# Altium PCB OErs_Drone.PcbDoc
Units mil, origin at the board's own origin, x right, y up, seen from the top; angles counter-clockwise.
Board outline 6299.74 x 4274.94 mil, 2 copper layers (Top Layer, Bottom Layer), stack 61.756 mil thick; 90 components, 68 nets, 329 pads, 0 vias.
Unrouted connection lines stored in the file: 222.
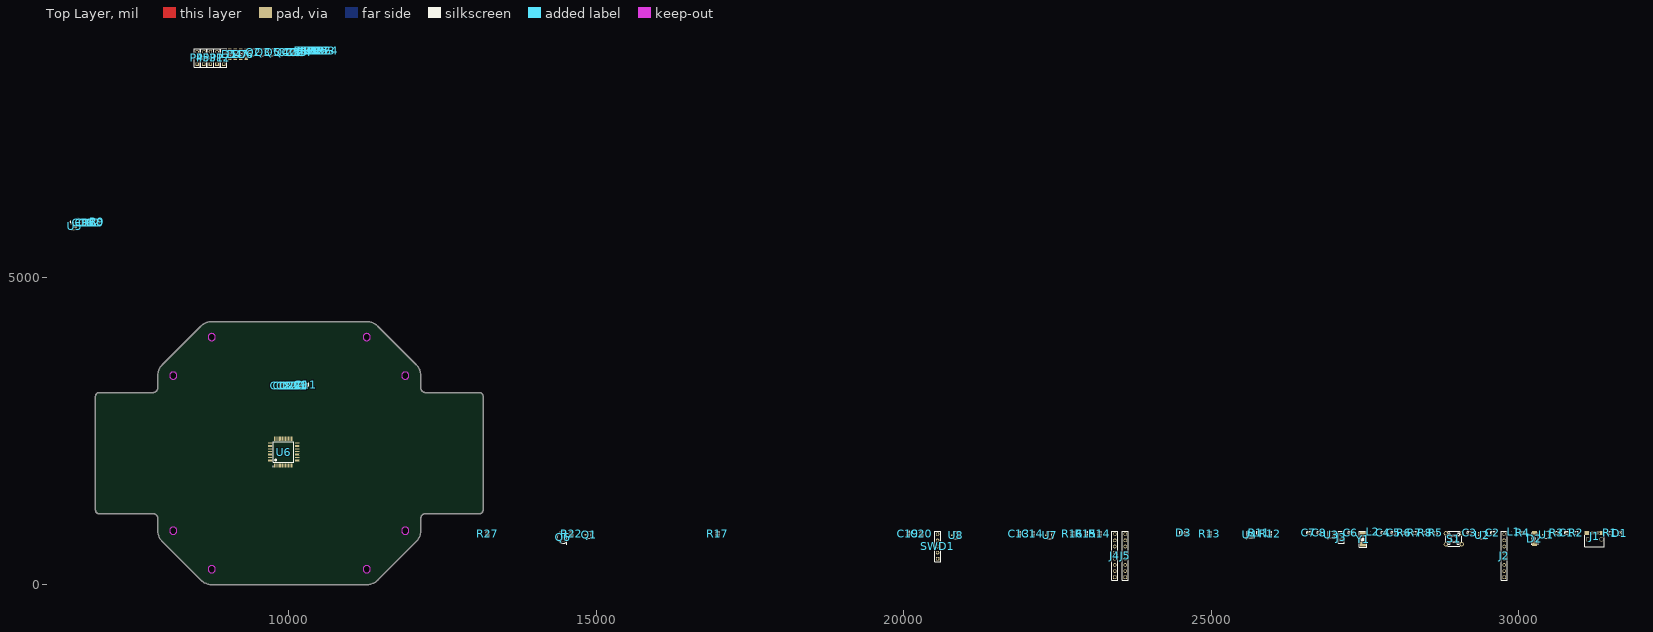
[diagram p0: Top Layer view]
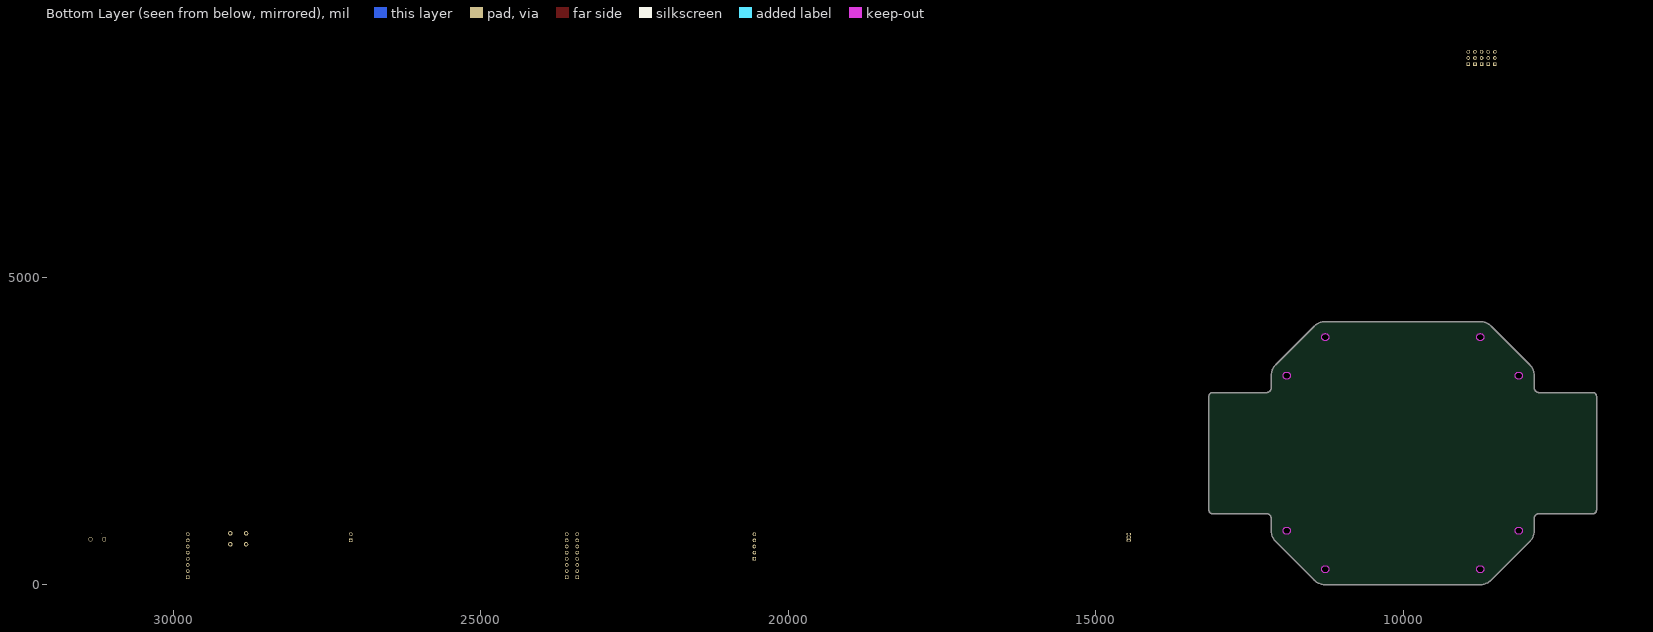
[diagram p1: Bottom Layer view, seen from below]

## Layer stack, top to bottom
Top Solder: solder mask 1, SM-001, Dk 4
Top Layer: signal copper 1.378
Dielectric 1: core 59, Core-043, Dk 4.3
Bottom Layer: signal copper 1.378
Bottom Solder: solder mask 1, SM-001, Dk 4

## Board outline
6920.92,1152.94 7795.53,1152.94 cw(c7795.53,1074.46) 7874,1074.46 7874,877.61 ccw(c8125.45,877.61) 7948.81,698.66 ccw(c8125.45,877.61) 7948.82,698.65 8572.69,74.78 8572.69,74.77 ccw(c8751.63,251.43) 8751.63,-0.01 11271.31,-0.01 ccw(c11271.31,251.43) 11447.67,72.21 ccw(c11271.31,251.43) 11447.68,72.21 ccw(c11271.31,251.43) 11450.89,75.43 12059.81,685.58 ccw(c11897.49,877.61) 12089.86,715.68 ccw(c11897.49,877.61) 12148.94,877.61 12148.94,1074.46 cw(c12227.42,1074.46) 12227.42,1152.94 13102.02,1152.94 ccw(c13102.02,1212.26) 13161.34,1212.26 13161.34,3062.65 ccw(c13102.02,3062.65) 13102.02,3121.97 12227.42,3121.97 cw(c12227.42,3200.45) 12148.94,3200.45 12148.94,3397.3 ccw(c11897.49,3397.3) 12074.83,3575.55 12074.83,3575.56 11449.77,4200.62 11449.76,4200.63 cw(c11271.31,4023.48) 11449.77,4200.62 11449.76,4200.63 ccw(c11271.31,4023.48) 11271.31,4274.92 8751.63,4274.92 ccw(c8751.63,4023.48) 8574.59,4202.03 ccw(c8574.77,4201.85) 8574.59,4202.03 8574.58,4202.03 cw(c8751.63,4023.48) 8574.59,4202.03 8574.58,4202.03 ccw(c8751.63,4023.48) 8573.08,4200.52 ccw(c8751.63,4023.48) 8573.07,4200.52 8573.08,4200.52 7948.07,3575.51 ccw(c8125.45,3397.3) 7874,3397.3 7874,3200.45 cw(c7795.53,3200.45) 7795.53,3121.97 6920.92,3121.97 ccw(c6920.92,3062.65) 6861.6,3062.65 6861.6,1212.26 ccw(c6920.92,1212.26)
cut-out: 8066.39,877.61 ccw(c8125.45,877.61) 8125.45,818.56 ccw(c8125.45,877.61) 8184.5,877.61 ccw(c8125.45,877.61) 8125.45,936.67 ccw(c8125.45,877.61)
cut-out: 8692.57,251.43 ccw(c8751.63,251.43) 8751.63,192.38 ccw(c8751.63,251.43) 8810.68,251.43 ccw(c8751.63,251.43) 8751.63,310.49 ccw(c8751.63,251.43)
cut-out: 11212.26,251.43 ccw(c11271.31,251.43) 11271.31,192.38 ccw(c11271.31,251.43) 11330.37,251.43 ccw(c11271.31,251.43) 11271.31,310.49 ccw(c11271.31,251.43)
cut-out: 11838.44,877.61 ccw(c11897.49,877.61) 11897.49,818.56 ccw(c11897.49,877.61) 11956.55,877.61 ccw(c11897.49,877.61) 11897.49,936.67 ccw(c11897.49,877.61)
cut-out: 11838.44,3397.3 ccw(c11897.49,3397.3) 11897.49,3338.24 ccw(c11897.49,3397.3) 11956.55,3397.3 ccw(c11897.49,3397.3) 11897.49,3456.35 ccw(c11897.49,3397.3)
cut-out: 11212.26,4023.48 ccw(c11271.31,4023.48) 11271.31,3964.42 ccw(c11271.31,4023.48) 11330.37,4023.48 ccw(c11271.31,4023.48) 11271.31,4082.53 ccw(c11271.31,4023.48)
cut-out: 8692.57,4023.48 ccw(c8751.63,4023.48) 8751.63,3964.42 ccw(c8751.63,4023.48) 8810.68,4023.48 ccw(c8751.63,4023.48) 8751.63,4082.53 ccw(c8751.63,4023.48)
cut-out: 8066.39,3397.3 ccw(c8125.45,3397.3) 8125.45,3338.24 ccw(c8125.45,3397.3) 8184.5,3397.3 ccw(c8125.45,3397.3) 8125.45,3456.35 ccw(c8125.45,3397.3)

## Design rules (kind name [scope] priority, off if disabled: settings)
Clearance [All] p1: gap=6 ignorepadtopadclearanceinfootprint=FALSE except(0: Arc-Hole Track-Hole SMDPad-Hole THPad-Hole Via-Hole Fill-Hole Poly-Hole Region-Hole Text-Hole)
ComponentClearance [All] p1: gap=0 collisioncheckmode=3 verticalgap=0 showdistances=FALSE
HoleToHoleClearance [All] p1: gap=4 allowstackedmicrovias=TRUE
MinimumSolderMaskSliver [All] p1: minsoldermaskwidth=4
NetAntennae [All] p1: netantennaetolerance=2
PolygonConnect [All] p1: thpad.connectstyle=Relief thpad.reliefconductorwidth=10 thpad.reliefentries=4 thpad.polygonreliefangle="90 Angle" thpad.airgapwidth=10 smdpad.connectstyle=Direct smdpad.reliefconductorwidth=10 smdpad.reliefentries=4 smdpad.polygonreliefangle="90 Angle" smdpad.airgapwidth=10 via.connectstyle=Direct via.reliefconductorwidth=10 via.reliefentries=4 via.polygonreliefangle="90 Angle" via.airgapwidth=10
RoutingVias [All] p1: holewidth=12 width=24 viastyle="Through Hole" minholewidth=12 minwidth=24 maxholewidth=15 maxwidth=25
SilkToSilkClearance [All] p1: silktosilkclearance=1
SilkToSolderMaskClearance [IsPad] p1: minsilkscreentomaskgap=1 clearancetoexposedcopper=TRUE
SolderMaskExpansion [All] p1: expansion=4 istentingtop=FALSE
UnRoutedNet [All] p1: checkbadconnections=TRUE
Width [All] p1: maxlimit=50 minlimit=6 preferedwidth=6
23 further rules are at their usual default settings.

## Components (designator, comment, footprint, x,y, rotation, side; value= is the part's Value field where it differs from the comment)
C1 "C_0402" C0402 30780,845 r0 top value=0.1uF
C2 "C_0402" C0402 29575,845 r0 top value=22uF
C3 "C_0402" C0402 29200,845 r0 top value=15pF
C4 "C_0402" C0402 27795,845 r0 top value=20pF
C5 "C_0402" C0402 27965,845 r0 top value=22uF
C6 "C_0402" C0402 27265,845 r0 top value=20pF
C7 "C_0402" C0402 26585,845 r0 top value=0.1uF
C8 "C_0402" C0402 26755,845 r0 top value=0.1uF
C9 "C_0402" C0402 10209.97,3248.43 r0 top value=0.1uF
C10 "C_0402" C0402 9983.58,3234.65 r90 top value=0.1uF
C11 "C_0402" C0402 10290.68,3248.43 r0 top value=0.1uF
C12 "C_0402" C0402 6768.41,5884.65 r90 top value=0.1uF
C13 "C_0402" C0402 21880,830 r90 top value=0.1uF
C14 "C_0402" C0402 22100,830 r90 top value=0.1uF
C15 "C_0402" C0402 6715.26,5884.65 r90 top value=0.1uF
C16 "C_0402" C0402 6662.11,5884.65 r90 top value=10nF
C17 "C_0402" C0402 9930.42,3234.65 r90 top value=0.1uF
C18 "C_0402" C0402 9877.27,3234.65 r90 top value=0.1uF
C19 "C_0402" C0402 20075,830 r90 top value=0.1uF
C20 "C_0402" C0402 20295,830 r90 top value=0.1uF
C21 "C_0402" C0402 10143.03,3234.65 r90 top value=0.1uF
C22 "C_0603" C0603 10076.31,8655 r90 top value=10uF
C23 "C_0603" C0603 10010.19,8655 r90 top value=10uF
C24 "C_0603" C0603 10208.55,8655 r90 top value=10uF
C25 "C_0603" C0603 10142.43,8655 r90 top value=10uF
C26 "C_0402" C0402 10089.88,3234.65 r90 top value=4.7uF
C27 "C_0402" C0402 10036.73,3234.65 r90 top value=0.1uF
D1 "RGB_LED" LED-RGB 31635,835 r0 top
D2 "SS14" SMA_L4.4-W2.8-LS5.4-RD 30255,750 r90 top
D3 "LED_0603" LED0603-FD 24550,840 r0 top
D4 "1N4148" SOD-123_L2.8-W1.8-LS3.7-RD 9132.48,8620.45 r90 top
D5 "1N4148" SOD-123_L2.8-W1.8-LS3.7-RD 9043.74,8620.45 r90 top
D6 "1N4148" SOD-123_L2.8-W1.8-LS3.7-RD 9309.96,8620.45 r90 top
D7 "1N4148" SOD-123_L2.8-W1.8-LS3.7-RD 9221.22,8620.45 r90 top
J1 "MICRO_USB_5S" MICRO-USB-SMD_U254-051T-4BH83-F1S 31230,790 r0 top
J2 "MC7RB" HDR1X8 29760,120 r90 top
J3 "Header 2H" HDR1X2 27110,720 r90 top
J4 "openMV" HDR1X8 23430,120 r90 top
J5 "openMV" HDR1X8 23600,120 r90 top
L1 "" 0603 29915,860 r0 top value=4.7uH
L2 "" 0603 27620,860 r0 top value=300@100MHZ
P1 "HEAD3" HDR1X3 8837.56,8461.06 r90 top
P2 "HEAD3" HDR1X3 8945.43,8461.06 r90 top
P3 "HEAD3" HDR1X3 8729.68,8461.06 r90 top
P4 "HEAD3" HDR1X3 8513.94,8461.06 r90 top
P5 "HEAD3" HDR1X3 8621.81,8461.06 r90 top
Q1 "AO3401" SOT-23-3_L2.9-W1.3-P1.90-LS2.4-BR 14885,810 r0 top
Q2 "SI2302" SOT-23-3_L2.9-W1.3-P1.90-LS2.4-BR 9432.14,8652.52 r0 top
Q3 "SI2302" SOT-23-3_L2.9-W1.3-P1.90-LS2.4-BR 9587.75,8652.52 r0 top
Q4 "SI2302" SOT-23-3_L2.9-W1.3-P1.90-LS2.4-BR 9898.97,8652.52 r0 top
Q5 "SI2302" SOT-23-3_L2.9-W1.3-P1.90-LS2.4-BR 9743.36,8652.52 r0 top
Q6 "SS9013" TO-92A 14465,770 r0 top
R1 "R_0402" R0402 31485,845 r0 top value=470
R2 "R_0402" R0402 30930,845 r0 top value=330
R3 "R_0402" R0402 30610,845 r0 top value=10K
R4 "R_0402" R0402 30065,845 r0 top value=100
R5 "R_0402" R0402 28645,845 r0 top value=73.2K
R6 "R_0402" R0402 28135,845 r0 top value=100K
R7 "R_0402" R0402 28305,845 r0 top value=10K
R8 "R_0402" R0402 28475,845 r0 top value=4.7K
R9 "R_0402" R0402 6888.51,5898.42 r0 top value=4.7K
R10 "R_0402" R0402 6821.57,5884.65 r90 top value=4.7K
R11 "R_0402" R0402 25775,845 r0 top value=10K
R12 "R_0402" R0402 25960,830 r90 top value=4.7K
R13 "R_0402" R0402 24975,830 r90 top value=10K
R14 "R_0402" R0402 23185,830 r90 top value=10K
R15 "R_0402" R0402 22965,830 r90 top value=10K
R16 "R_0402" R0402 22745,830 r90 top value=10K
R17 "R_0402" R0402 16975,830 r90 top value=10K
R18 "R_0402" R0402 10267.84,8674.65 r90 top value=100R
R19 "R_0402" R0402 10427.29,8674.65 r90 top value=100R
R20 "R_0402" R0402 10374.14,8674.65 r90 top value=100R
R21 "R_0402" R0402 10320.99,8674.65 r90 top value=100R
R22 "R_0402" R0402 14605,830 r90 top value=1K
R23 "R_0402" R0402 10586.75,8674.65 r90 top value=10K
R24 "R_0402" R0402 10639.9,8674.65 r90 top value=10K
R25 "R_0402" R0402 10480.45,8674.65 r90 top value=10K
R26 "R_0402" R0402 10533.6,8674.65 r90 top value=10K
R27 "R_0402" R0402 13240,830 r90 top value=10K
S1 "667" KEY-TH_4P-L6.0-W6.0-P4.50-LS6.5 28940,745 r0 top
SWD1 "SWD" HDR1X5 20550,420 r90 top
U1 "BAT54C" SOT-23-3_L2.9-W1.6-P1.90-LS2.8-BR 30445,810 r0 top
U2 "SX1308" SOT-23-6_L2.9-W1.6-P0.95-LS2.8-BR 29405,805 r0 top
U3 "BMP280" SENSOR-TH_BMP280-BL 26950,815 r0 top
U4 "BMP280" SENSOR-TH_BMP280-BL 25625,815 r0 top
U5 "MPU9250" MPU9250 6466.97,5765.43 r0 top
U6 "STM32F411RE" LQFP-64_L10.0-W10.0-P0.50-LS12.0-BL 9920,2155 r0 top
U7 "XC6206" SOT-23-3_L3.0-W1.7-P0.95-LS2.9-BR 22370,805 r0 top
U8 "XC6206" SOT-23-3_L3.0-W1.7-P0.95-LS2.9-BR 20845,805 r0 top
Y1 "8MHZ" OSC-SMD_L5.0-W3.2 27465,735 r90 top

## Footprints (in the part's own frame and the unit in brackets; to place one, negate y for a bottom-side part, rotate by r counter-clockwise, add the part's x,y. Pads: shape width x height; smd on the part's side, far side on the other; paste and mask are expansions set on the pad)
0603 [mm] "Chip Inductor, Body 0.6x0.3mm, IPC High Density"
  rect 0.5x0.3 smd: 1(-0.35,0) 2(0.35,0)
  silkscreen extent -0.9,-0.05 -0.9,0.05, body extent -0.33,-0.18 0.33,0.18, height 0.55
C0402 [mm]
  rect 0.5x0.8 smd: 1(-0.5,0) 2(0.5,0)
  silkscreen extent -0.95,-0.6 0.95,0.6
C0603 [mm]
  rect 0.8x0.9 smd: 1(-0.7,0) 2(0.7,0)
  silkscreen extent -1.4,-0.7 1.4,0.72
HDR1X2 [mm] "Connector; Header; 2 Position"
  rect 1.5x1.5 hole 0.9: 1(0,0)
  round 1.5 hole 0.9: 2(2.54,0)
  silkscreen extent -1.27,-1.27 3.81,1.27
HDR1X3 [mm] "Connector; Header; 3 Position"
  rect 1.5x1.5 hole 0.9: 1(0,0)
  round 1.5 hole 0.9: 2(2.54,0) 3(5.08,0)
  silkscreen extent -1.27,-1.27 6.35,1.27
HDR1X5 [mm] "Connector; Header; 5 Position"
  rect 1.5x1.5 hole 0.9: 1(0,0)
  round 1.5 hole 0.9: 2(2.54,0) 3(5.08,0) 4(7.62,0) 5(10.16,0)
  silkscreen extent -1.27,-1.27 11.43,1.27
HDR1X8 [mm] "Connector; Header; 8 Position"
  rect 1.5x1.5 hole 0.9: 1(0,0)
  round 1.5 hole 0.9: 2(2.54,0) 3(5.08,0) 4(7.62,0) 5(10.16,0) 6(12.7,0) 7(15.24,0) 8(17.78,0)
  silkscreen extent -1.27,-1.27 19.05,1.27
KEY-TH_4P-L6.0-W6.0-P4.50-LS6.5 [mm]
  round 1.8 hole 1.1: 1(-3.251,-2.25) 2(3.251,-2.25) 3(3.251,2.25) 4(-3.251,2.25)
  silkscreen extent -3.3,-3.05 3.3,3.05
LED0603-FD [mm]
  rect 0.9x1 smd: 1(-0.85,0) 2(0.85,0)
  silkscreen extent -1.55,-0.75 1.75,0.75
LED-RGB [mm]
  rect 0.35x0.35 smd: 1(0.4,0.4) 2(0.4,-0.4) 3(-0.4,-0.4) 4(-0.4,0.4)
  silkscreen extent -0.8,-0.8 0.8,0.8
LQFP-64_L10.0-W10.0-P0.50-LS12.0-BL [mil]
  oval 11.02x70.7 smd: 1(-147.64,-218.5) 2(-127.95,-218.5) 3(-108.27,-218.5) 4(-88.58,-218.5) 5(-68.9,-218.5) 6(-49.21,-218.5) 7(-29.53,-218.5) 8(-9.84,-218.5) 9(9.84,-218.5) 10(29.53,-218.5) 11(49.21,-218.5) 12(68.9,-218.5) 13(88.58,-218.5) 14(108.27,-218.5) 15(127.95,-218.5) 16(147.64,-218.5) 33(147.64,218.5) 34(127.95,218.5) 35(108.27,218.5) 36(88.58,218.5) 37(68.9,218.5) 38(49.21,218.5) 39(29.53,218.5) 40(9.84,218.5) 41(-9.84,218.5) 42(-29.53,218.5) 43(-49.21,218.5) 44(-68.9,218.5) 45(-88.58,218.5) 46(-108.27,218.5) 47(-127.95,218.5) 48(-147.64,218.5)
  oval 70.7x11.02 smd: 17(218.5,-147.64) 18(218.5,-127.95) 19(218.5,-108.27) 20(218.5,-88.58) 21(218.5,-68.9) 22(218.5,-49.21) 23(218.5,-29.53) 24(218.5,-9.84) 25(218.5,9.84) 26(218.5,29.53) 27(218.5,49.21) 28(218.5,68.9) 29(218.5,88.58) 30(218.5,108.27) 31(218.5,127.95) 32(218.5,147.64) 49(-218.5,147.64) 50(-218.5,127.95) 51(-218.5,108.27) 52(-218.5,88.58) 53(-218.5,68.9) 54(-218.5,49.21) 55(-218.5,29.53) 56(-218.5,9.84) 57(-218.5,-9.84) 58(-218.5,-29.53) 59(-218.5,-49.21) 60(-218.5,-68.9) 61(-218.5,-88.58) 62(-218.5,-108.27) 63(-218.5,-127.95) 64(-218.5,-147.64)
  silkscreen extent -179,-238 167,167
MICRO-USB-SMD_U254-051T-4BH83-F1S [mm]
  rect 0.4x1.4 smd: 1(-1.3,1.325) 2(-0.65,1.325) 3(0,1.325) 4(0.65,1.325) 5(1.3,1.325)
  rect 2.1x1.6 smd: 6(3.1,1.225) 7(-3.1,1.225)
  oval 1.5x1.999 hole 0.9 slot 1.4 at 90 deg: 8(-2.83,-1.325) 9(2.83,-1.325)
  round 0.5 hole 0.5 unplated: ""(-2,1.025) ""(2,1.025)
  silkscreen extent -4,-4.33 4,0.39
MPU9250 [mil]
  rect 23.61x7.87 smd: 1(0,98.42) 2(0,82.67) 5(0,35.43)
  rect 23.61x7.9 smd: 3(0,66.95) 4(0,51.15) 6(0,19.65)
  rect 7.87x23.61 smd: 7(19.69,-0.01)
  rect 7.9x23.61 smd: 8(35.45,-0.01) 11(82.65,-0.01) 12(98.45,-0.01)
  rect 7.88x23.61 smd: 9(51.18,-0.01) 10(66.93,-0.01)
  rect 23.6x7.87 smd: 13(117.7,19.68)
  rect 23.6x7.9 smd: 14(117.7,35.45) 17(117.7,82.65) 18(117.7,98.45)
  rect 23.6x7.88 smd: 15(117.7,51.18) 16(117.7,66.93)
  rect 7.87x23.6 smd: 19(98.43,117.7) 20(82.68,117.7) 23(35.44,117.7)
  rect 7.9x23.6 smd: 21(66.95,117.7) 22(51.15,117.7) 24(19.65,117.7)
  rect 66.93x60.7 smd: P$25(59.06,59.05)
  silkscreen extent -20,0 167,158
OSC-SMD_L5.0-W3.2 [mm]
  rect 1.9x2.4 smd: 1(-2.05,0) 2(2.05,0)
  silkscreen extent -3.32,-1.6 3.33,1.6
R0402 [mm]
  rect 0.5x0.8 smd: 1(-0.5,0) 2(0.5,0)
  silkscreen extent -0.95,-0.6 0.95,0.6
SENSOR-TH_BMP280-BL [mil]
  rect 27.56x13.8 smd: 1(-31.5,-38.6) 2(-31.5,-13) 3(-31.5,13) 4(-31.5,38.6) 5(31.5,38.6) 6(31.5,13) 7(31.5,-13) 8(31.5,-38.6)
  silkscreen extent -63,-67 54,52
SMA_L4.4-W2.8-LS5.4-RD [mm]
  rect 1.8x2 smd: 1(-2.1,0) 2(2.1,0)
  silkscreen extent -2.3,-1.4 2.3,1.4
SOD-123_L2.8-W1.8-LS3.7-RD [mm]
  rect 1.2x1.4 smd: 1(-1.7,0) 2(1.7,0)
  silkscreen extent -1.5,-1 1.5,1
SOT-23-3_L2.9-W1.3-P1.90-LS2.4-BR [mm]
  rect 1.25x0.7 smd: 1(1.25,-0.95) 2(1.25,0.95) 3(-1.25,0)
  silkscreen extent -0.65,-1.46 0.9,1.46
SOT-23-3_L2.9-W1.6-P1.90-LS2.8-BR [mm]
  rect 1.25x0.7 smd: 1(1.25,-0.95) 2(1.25,0.95) 3(-1.25,0)
  silkscreen extent -0.65,-1.46 0.9,1.46
SOT-23-3_L3.0-W1.7-P0.95-LS2.9-BR [mm]
  rect 1.25x0.7 smd: 1(1.25,-0.95) 2(1.25,0.95) 3(-1.25,0)
  silkscreen extent -0.9,-1.6 0.9,1.6
SOT-23-6_L2.9-W1.6-P0.95-LS2.8-BR [mm]
  rect 1x0.55 smd: 1(1.4,-0.95) 2(1.4,0) 3(1.4,0.95) 4(-1.4,0.95) 5(-1.4,0) 6(-1.4,-0.95)
  silkscreen extent -0.9,-1.78 1.52,1.55
TO-92A [mm] "TO, Flat Index; 3 In-Line, Axial Leads; Body Dia. 4.5mm; Leads 0.51 x 0.48 mm (max)"
  oval 2x1 hole 0.9: 1(0,-1.27) 2(0,0) 3(0,1.27)
  silkscreen extent -2.48,-2.95 1.5,2.48, body extent -2.48,-2.5 1.5,2.5, height 6.86

## Part data
C1 C2 C3 C4 C5 C6 C7 C8 C9 C10 C11 C12 C13 C14 C15 C16 C17 C18 C19 C20 C21 C22 C23 C24 C25 C26 C27: library part Cap, "Capacitor", LatestRevisionDate=17-Jul-2002, LatestRevisionNote="Re-released for DXP Platform.", PackageDescription="Radial Cap, Thru-Hole; 2 Leads; 0.3 in Pin Spacing", PackageReference=RAD-0.3, Published=8-Jun-2000, Publisher="Altium Limited"
D1: "全彩RGB"
D2 D4 D5 D6 D7: library part Diode, "Default Diode", Code_JEDEC=DO-214-AB, LatestRevisionDate=17-Jul-2002, LatestRevisionNote="Re-released for DXP Platform.", PackageDescription="DO-214-AB/SMC; 2 C-Bend Leads; Body 7.9 x 5.9 mm, inc. leads (LxW)", PackageReference=SMC, PackageVersion=Sep-1996, Published=8-Jun-2000, Publisher="Altium Limited"
D3: library part LED2, "Typical RED, GREEN, YELLOW, AMBER GaAs LED", LatestRevisionDate=17-Jul-2002, LatestRevisionNote="Re-released for DXP Platform.", PackageDescription="SM LED; 2 Flat Leads", PackageReference=3.2X1.6X1.1, PackageVersion=Feb-2002, Published=8-Jun-2000, Publisher="Altium Limited"
J1: "USB接口"
J2: library part openMV, "外接"
J3: "Header, 2-Pin, Right Angle", LatestRevisionDate=17-Jul-2002, LatestRevisionNote="Re-released for DXP Platform.", Publisher="Altium Limited"
J4 J5: "外接openmv模组"
L1 L2: library part Inductor, "Inductor", Code_IEC=1005, Code_JEITA=0402, LatestRevisionDate=29-May-2009, LatestRevisionNote="IPC-7351 Footprint Added.", PackageDescription="Chip Inductor", PackageReference=0402-A, Published=8-Jun-2000, Publisher="Altium Limited"
P1 P2 P3 P4 P5: "3脚插口"
Q1: library part MOSFET-P, "P-Channel MOSFET", LatestRevisionDate=17-Jul-2002, LatestRevisionNote="Re-released for DXP Platform.", PackageDescription="TO, Flat Index; 3 In-Line, Axial Leads; Body Dia. 4.6mm; Lead Dia. 0.5 mm (max)", PackageReference=E3, PackageVersion=1995/1996, Published=8-Jun-2000, Publisher="Altium Limited"
Q2 Q3 Q4 Q5: library part FDB52N20, "N-Channel MOSFET"
Q6: library part 2N3904, "NPN General Purpose Amplifier", ComponentLink1Description="Manufacturer Link", ComponentLink1URL=http://www.fairchildsemi.com/, ComponentLink2Description=Datasheet, ComponentLink2URL=http://www.fairchildsemi.com/ds/2N%2F2N3904.pdf, DatasheetVersion=1997, LatestRevisionDate=15-Jan-2003, LatestRevisionNote="PCB Footprint 'BCY-W3/D4.7' replaced", PackageDescription="TO, Flat Index; 3 In-Line, Axial Leads; Body Dia. 4.5mm; Leads 0.51 x 0.48 mm (max)", PackageReference=TO-92A, PackageVersion=Sep-1998, Published=8-Jun-2000, Publisher="Altium Limited"
R1 R2 R3 R4 R5 R6 R7 R8 R9 R10 R11 R12 R13 R14 R15 R16 R17 R18 R19 R20 R21 R22 R23 R24 R25 R26 R27: library part Res2, "Resistor", LatestRevisionDate=17-Jul-2002, LatestRevisionNote="Re-released for DXP Platform.", PackageDescription="Axial Device, Thru-Hole; 2 Leads; 0.4 in Pin Spacing", PackageReference=AXIAL-0.4, Published=8-Jun-2000, Publisher="Altium Limited"
S1: library part SW-PB, "Switch", LatestRevisionDate=17-Jul-2002, LatestRevisionNote="Re-released for DXP Platform.", PackageDescription="Switch; 2 Leads", PackageReference=SPST-2, Published=24-Mar-1999, Publisher="Altium Limited"
SWD1: "Header, 5-Pin", LatestRevisionDate=17-Jul-2002, LatestRevisionNote="Re-released for DXP Platform.", Publisher="Altium Limited"
U1: "二通一限流"
U2: "电源控制"
U3 U4: "气压计"
U5: "9轴陀螺仪传感器"
U6: "单片机"
U7 U8: "5to3.3"
Y1: library part SMD5032, "晶振"

## Nets (pads, with @x,y where several pads share a name; then routed paths per layer and width w, separated by ;. In a path a pad name is that pad's centre, name@x,y a point inside that pad or via, vN(x,y) a via of type N, cw(c..) or ccw(c..) an arc to the next point about the centre after c; other vN are vias at no path point)
3V3_1: C7.2 C8.2 C9.1 C10.1 C11.1 C12.2 C14.2 C16.2 C17.1 C18.1 C21.2 C27.2 D1.1 J5.5 P5.2 R3.2 R8.2 R9.2 R10.2 R12.2 R14.1 SWD1.1 U3.2 U3.6 U3.8 U4.2 U4.5 U4.6 U4.8 U5.1 U5.8 U5.9 U5.13 U5.22 U6.1 U6.13 U6.19 U6.32 U6.48 U6.64 U7.2
3V3_2: C20.2 U8.2
5V: C13.2 C19.2 Q1.3 R17.2 U1.2 U7.3 U8.3
BOOT0: J5.7 R15.2 U6.60
DBG_RX: J4.4 U6.43
DBG_TX: J4.3 U6.42
GND: C1.1 C2.1 C4.2 C5.1 C6.2 C7.1 C8.1 C9.2 C10.2 C11.2 C12.1 C13.1 C14.1 C15.1 C16.1 C17.2 C18.2 C19.1 C20.1 C21.1 C26.1 C27.1 D3.2 J1.5 J2.1 J5.1 L2.1 P1.3 P2.3 P3.3 P4.3 P5.3 Q2.2 Q3.2 Q4.2 Q5.2 R7.1 R13.2 R15.1 R16.1 R23.1 R24.1 R25.1 R26.1 S1.1 SWD1.2 U2.2 U3.1 U3.5 U3.7 U4.1 U4.7 U5.11 U5.18 U5.20 U6.12 U6.18 U6.31 U6.47 U6.63 U7.1 U8.1
I2C_SCL: R10.1 U3.4 U4.4 U5.23 U6.58
I2C_SDA: R9.1 U3.3 U4.3 U5.24 U6.59
LED_B: R4.1 U6.51
LED_G: R2.1 U6.52
LED_R: R1.1 U6.53
MPU_INT: U5.12 U6.56
NetC2_2: C2.2 C3.2 D2.2 R5.2 U1.3
NetC3_1: C3.1 R5.1 R7.2 U2.3
NetC15_2: C15.2 U5.10
NetC22_1: C22.1 D4.1 P1.1 Q2.3
NetC23_1: C23.1 D5.1 P2.1 Q3.3
NetC24_1: C24.1 D6.1 P3.1 Q4.3
NetC25_1: C25.1 D7.1 P4.1 Q5.3
NetC26_2: C26.2 U6.30
NetD1_2: D1.2 R1.2
NetD1_3: D1.3 R2.2
NetD1_4: D1.4 R4.2
NetD2_1: D2.1 L1.2 U2.1
NetD3_1: D3.1 R12.1
NetJ1_6: J1.6 J1.7 J1.8 J1.9 L2.2
NetQ1_1: Q1.1 Q6.3 R17.1
NetQ2_1: Q2.1 R18.1 R23.2
NetQ3_1: Q3.1 R19.1 R24.2
NetQ4_1: Q4.1 R20.1 R25.2
NetQ5_1: Q5.1 R21.1 R26.2
NetQ6_1: Q6.1 R27.1
NetQ6_2: Q6.2 R22.1 R27.2
NetR6_1: R6.1 U2.4
nRST: C1.2 R3.1 S1.3 SWD1.3 U6.7
OM_5V: J5.2 Q1.2
OM_ADC: J4.2 U6.15
OM_P0: J4.8
OM_P1: J4.7
OM_P2: J4.6
OM_P3: J4.5
OM_P8: J5.4
OM_PWR: R22.2 U6.2
OM_RST: J5.8 R14.2 U6.4
OM_TEST: J5.6 R16.2 U6.3
OSC_I: C4.1 U6.5 Y1.1
OSC_O: C6.1 U6.6 Y1.2
PWM1: R18.2 U6.22
PWM2: R19.2 U6.23
PWM3: R20.2 U6.26
PWM4: R21.2 U6.27
PWM5: J5.3 P5.1
S1_IN: J2.3 U6.8
S2_IN: J2.4 U6.9
S3_IN: J2.5 U6.10
S4_IN: J2.6 U6.11
S5_IN: J2.7 U6.24
S6_IN: J2.8 U6.25
SWCLK: SWD1.5 U6.49
SWDIO: SWD1.4 U6.46
U6_RX: J3.2 U6.38
U6_TX: J3.1 U6.37
USB_DM: J1.2 U6.44
USB_DP: J1.3 R8.1 U6.45
VBAT: C5.2 C22.2 C23.2 C24.2 C25.2 D4.2 D5.2 D6.2 D7.2 J2.2 L1.1 P1.2 P2.2 P3.2 P4.2 R6.2 R11.1 U2.5
VBAT_TST: R11.2 R13.1 U6.14
VDD_IN: J1.1 U1.1
pads on no net: J1. J1.4 J4.1 S1.2 S1.4 U2.6 U5.2 U5.3 U5.4 U5.5 U5.6 U5.7 U5.14 U5.15 U5.16 U5.17 U5.19 U5.21 U5.P$25 U6.16 U6.17 U6.20 U6.21 U6.28 U6.29 U6.33 U6.34 U6.35 U6.36 U6.39 U6.40 U6.41 U6.50 U6.54 U6.55 U6.57 U6.61 U6.62

## Silkscreen, mask and mechanical layers (free items; w line width, h text height)
Mechanical 1:
  circle w0.5: c8751.63,251.43 r59.06
  circle w0.5: c11271.31,4023.48 r59.06
  circle w0.5: c11271.31,251.43 r59.06
  circle w0.5: c11897.49,877.61 r59.06
  circle w0.5: c8125.45,877.61 r59.06
  circle w0.5: c8751.63,4023.48 r59.06
  circle w0.5: c8125.45,3397.3 r59.06
  circle w0.5: c11897.49,3397.3 r59.06
  lines w0.5: 8573.26,4200.33 cw(c8751.63,4023.48) 8751.63,4274.66 11271.31,4274.66 cw(c11271.31,4023.48) 11449.58,4200.43 12074.64,3575.37 cw(c11897.49,3397.3) 12148.68,3397.3 12148.68,3200.45 ccw(c12227.42,3200.45) 12227.42,3121.71 13102.02,3121.71 cw(c13102.02,3062.65) 13161.08,3062.65 13161.08,2137.45 13161.08,1212.26 cw(c13102.02,1212.26) 13102.02,1153.2 12227.42,1153.2 ccw(c12227.42,1074.46) 12148.68,1074.46 12148.68,877.61 cw(c11897.49,877.61) 12059.63,685.77 ; 8574.77,4201.85 7948.25,3575.33 ccw(c8125.45,3397.3) 7874.27,3397.3 7874.27,3200.45 cw(c7795.53,3200.45) 7795.53,3121.71 6920.92,3121.71 ccw(c6920.92,3062.65) 6861.86,3062.65 6861.86,2137.45 6861.86,1212.26 ccw(c6920.92,1212.26) 6920.92,1153.2 7795.53,1153.2 cw(c7795.53,1074.46) 7874.27,1074.46 7874.27,877.61 ccw(c8125.45,877.61) 7949.01,698.84 8572.88,74.96 ccw(c8751.63,251.43) 8751.63,0.25 11271.31,0.25 ccw(c11271.31,251.43) 11450.7,75.62 ; 11447.49,72.39 12089.66,715.86

## Text inside footprints (layer, text, board x,y; h text height)
U5: Top Overlay "+y" at 6564.69,5943.56 h19.68 r337; Top Overlay "+x" at 6637.57,5876.19 h19.68